# Altium PCB BP.PcbDoc
Units mm, origin at the board's own origin, x right, y up, seen from the top; angles counter-clockwise.
Board outline 87 x 100 mm, 2 copper layers (Top Layer, Bottom Layer); 36 components, 120 nets, 137 pads, 0 vias.
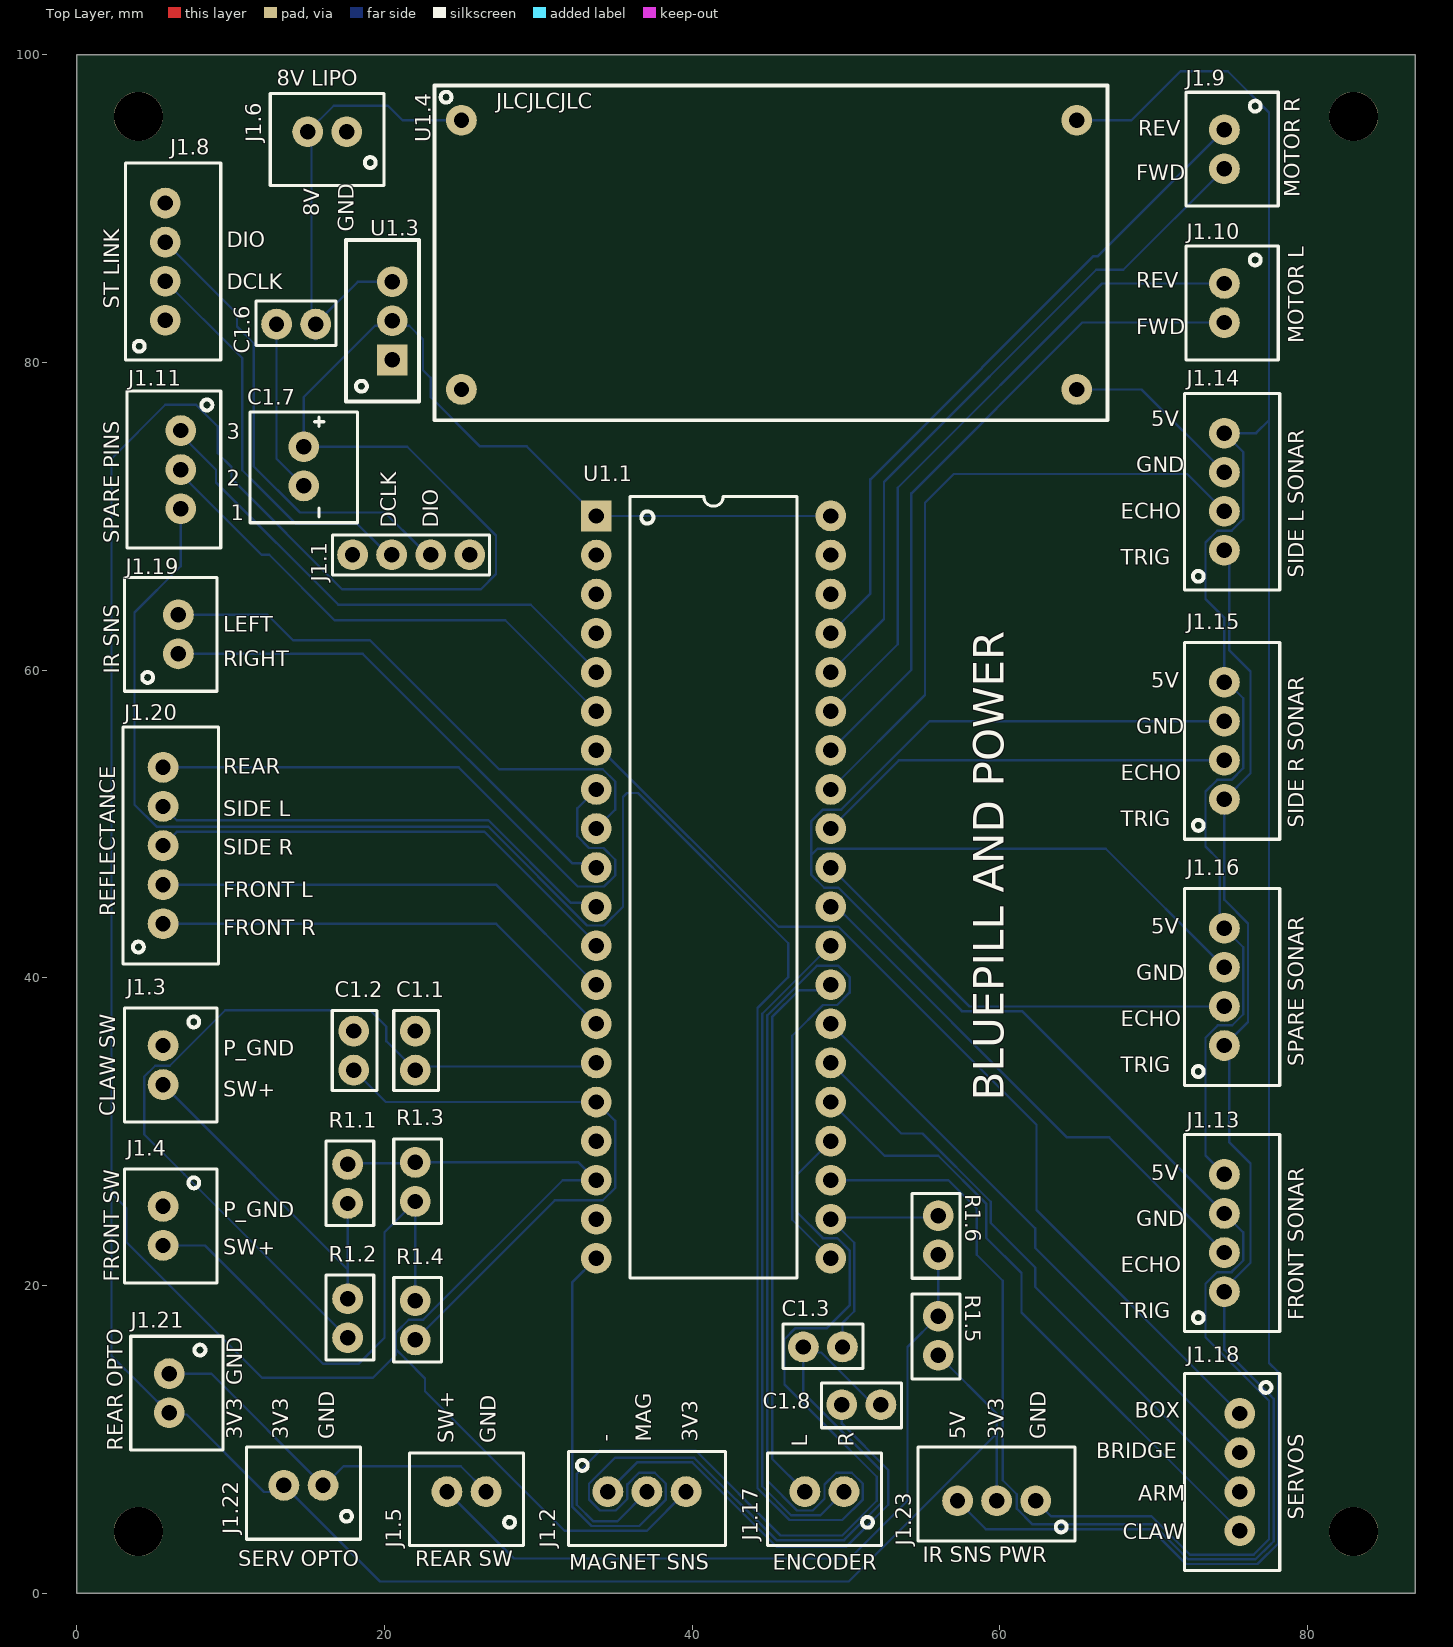
[diagram p0: Top Layer view]
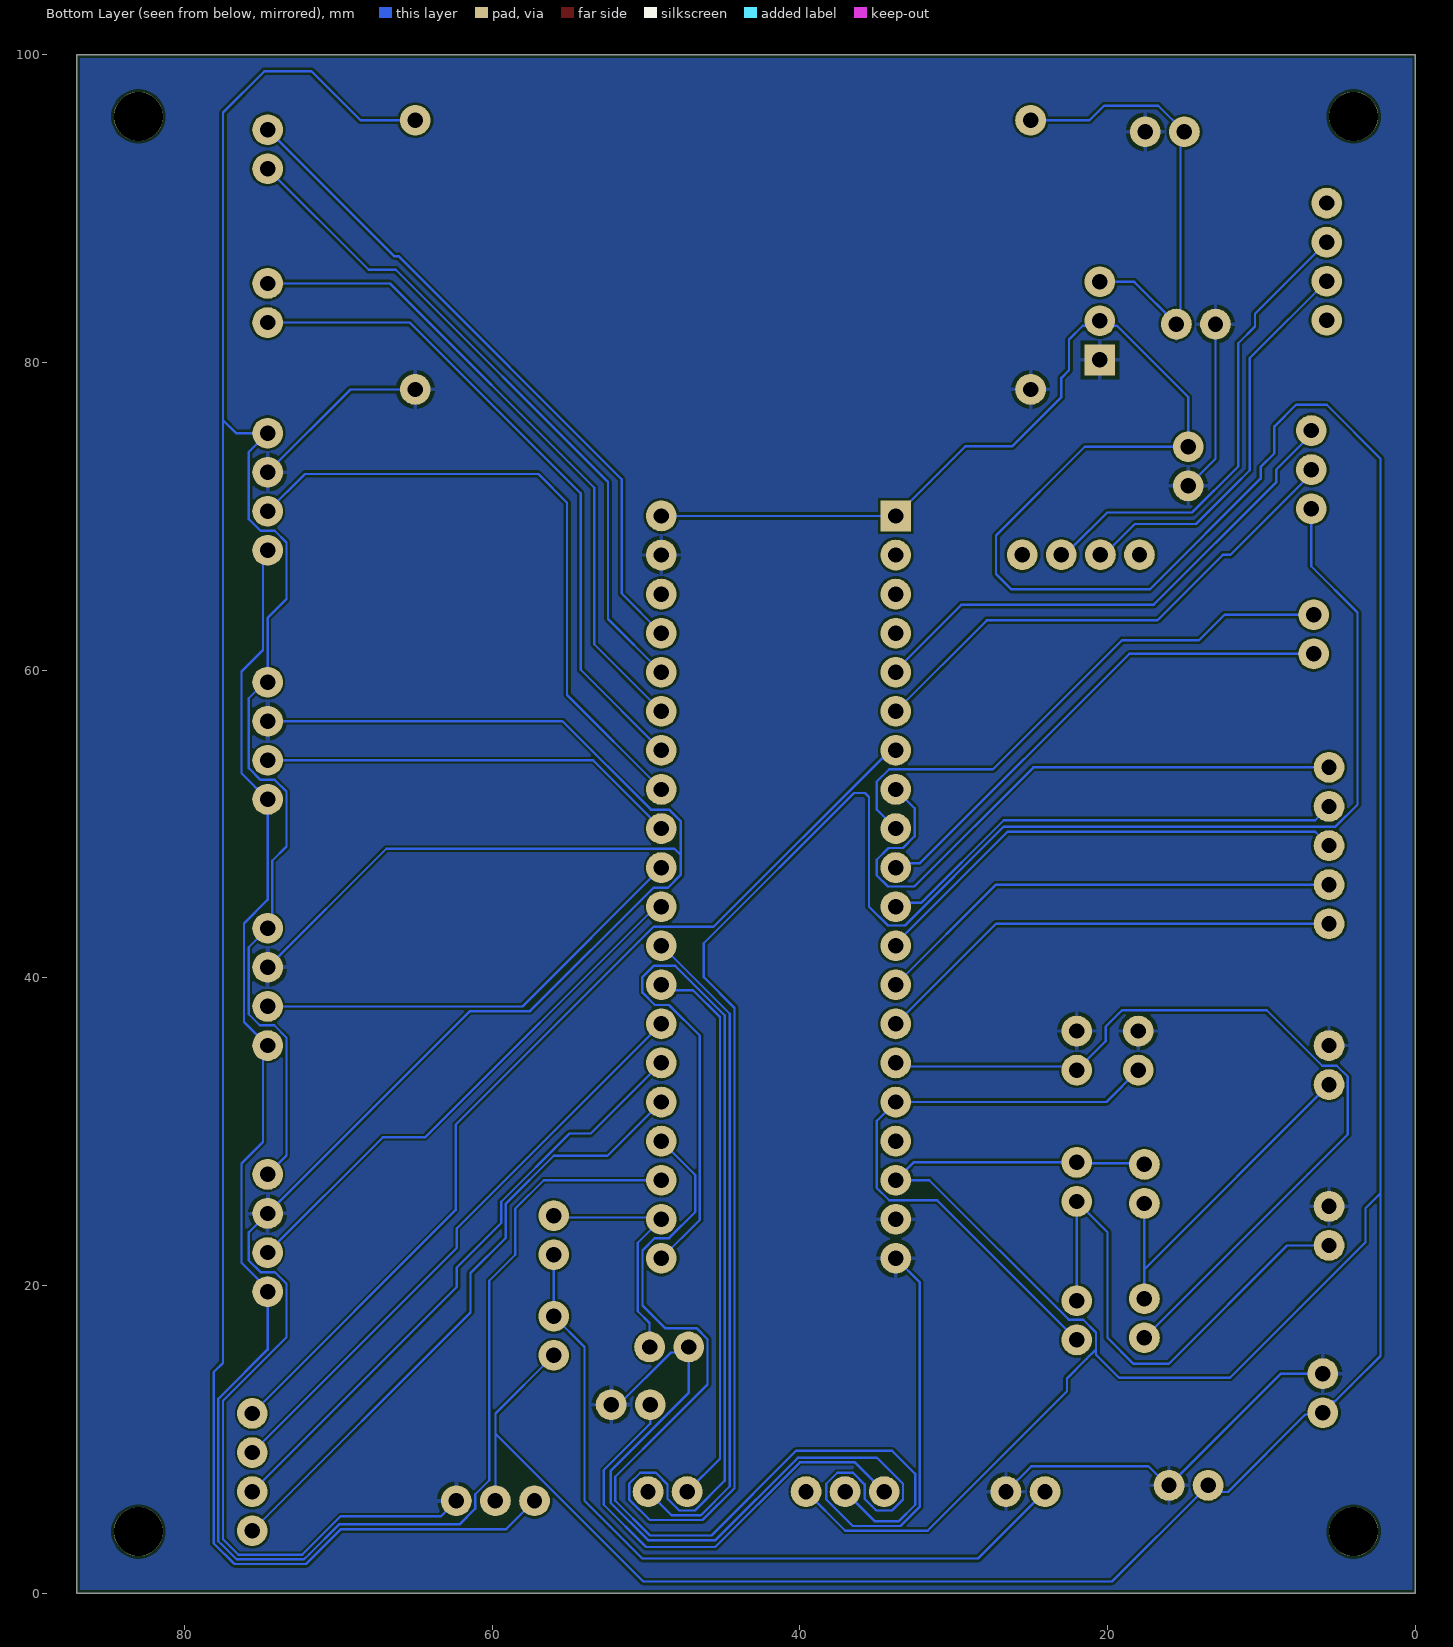
[diagram p1: Bottom Layer view, seen from below]

## Layer stack, top to bottom
Top Solder: solder mask 0.0102, Solder Resist, Dk 3.5
Top Layer: signal copper 0.0356
Dielectric 1: dielectric 0.32, FR-4, Dk 4.8
Bottom Layer: signal copper 0.0356
Bottom Solder: solder mask 0.0102, Solder Resist, Dk 3.5

## Board outline
0,0 0,100 87,100 87,0

## Design rules (kind name [scope] priority, off if disabled: settings)
BoardOutlineClearance [All] p1: gap=0.2 ignorepadtopadclearanceinfootprint=FALSE
Clearance [All] p1: gap=0.152 ignorepadtopadclearanceinfootprint=FALSE
HoleSize [All] p1: absolutevalues=TRUE maxlimit=100 minlimit=0.4 maxpercent=80.000 minpercent=20.000
PolygonConnect [All] p1: connectstyle=Relief reliefconductorwidth=0.254 reliefentries=4 polygonreliefangle="90 Angle" airgapwidth=0.254
RoutingVias [All] p1: holewidth=0.4 width=0.8 viastyle="Through Hole" minholewidth=0.4 minwidth=0.6 maxholewidth=100 maxwidth=100
SilkToSilkClearance [All] p1: silktosilkclearance=0
SilkToSolderMaskClearance [IsPad] p1: minsilkscreentomaskgap=0 clearancetoexposedcopper=TRUE
SolderMaskExpansion [All] p1: expansion=0.102 istentingtop=FALSE
Width [All] p1: maxlimit=100 minlimit=0.152 preferedwidth=0.152
27 further rules are at their usual default settings.

## Components (designator, comment, footprint, x,y, rotation, side; value= is the part's Value field where it differs from the comment)
C1.1 "100n" "Non Polarized Cap" 22,35.27 r270 top
C1.2 "100n" "Non Polarized Cap" 18,35.27 r270 top
C1.3 "100n" "Non Polarized Cap" 48.5,16 r0 top
C1.6 "470n" "Non Polarized Cap" 14.25,82.5 r0 top
C1.7 "10u" "Polarized Cap" 14.75,73.25 r270 top
C1.8 "10n" "Non Polarized Cap" 51,12.25 r180 top
J1.1 "Debug" "Four Pads" 21.73,67.5 r180 top
J1.2 "Magnet Sensor" "3pos JST" 37.06,6.6 r0 top
J1.3 "Claw Microswitch" "2pos JST" 5.6,34.33 r270 top
J1.4 "Front Microswitch" "2pos JST" 5.6,23.87 r270 top
J1.5 "Rear Microswitch" "2pos JST" 25.33,6.6 r180 top
J1.6 "8V Lipo" "2pos JST" 16.27,95 r180 top
J1.8 "SWD BP" "4Pos JST" 5.75,86.56 r90 top
J1.9 "Right Motor BP" "2pos JST" 74.6,93.87 r270 top
J1.10 "Right Motor BP" "2pos JST" 74.6,83.87 r270 top
J1.11 "Spare and Encoder Left" "3pos JST" 6.75,73.04 r270 top
J1.13 "Sonar Front Middle" "4Pos JST" 74.6,23.41 r90 top
J1.14 "Sonar Side Left" "4Pos JST" 74.6,71.6 r90 top
J1.15 "Sonar Side Right" "4Pos JST" 74.6,55.41 r90 top
J1.16 "Sonar Spare" "4Pos JST" 74.6,39.41 r90 top
J1.17 "Encoder Right" "2pos JST" 48.6,6.6 r180 top
J1.18 "Servos" "4Pos JST" 75.6,7.87 r270 top
J1.19 "IR Sensors" "2pos JST" 6.6,62.33 r90 top
J1.20 "Reflectance Sensors" "5POS JST" 5.6,48.6 r90 top
J1.21 "Rear Motor Optocoupler Pwr" "2pos JST" 6,13 r270 top
J1.22 "Servo Optocoupler Pwr" "2pos JST" 14.73,7 r180 top
J1.23 "IR Sensor Power" "3pos JST" 59.79,6 r180 top
R1.1 "10k" Res_Generic 17.6,26.6 r90 top
R1.2 "1k" Res_Generic 17.6,17.87 r90 top
R1.3 "10k" Res_Generic 22,26.73 r90 top
R1.4 "1k" Res_Generic 22,17.73 r90 top
R1.5 "10k" Res_Generic 56,16.73 r270 top
R1.6 "1k" Res_Generic 56,23.27 r270 top
U1.1 "Bluepill" DIP40 41.386,45.896 r0 top
U1.3 "3.3V" TO220 20.5,82.71 r90 top
U1.4 "5V SWITCHER" "ADJ Switcher" 45,87 r0 top

## Footprints (in the part's own frame and the unit in brackets; to place one, negate y for a bottom-side part, rotate by r counter-clockwise, add the part's x,y. Pads: shape width x height; smd on the part's side, far side on the other; paste and mask are expansions set on the pad)
"2pos JST" [mm]
  round 2 hole 1: 1(-1.27,0) 2(1.27,0)
  silkscreen extent -3.7,-2.5 3.7,3.5, body extent -3.7,-2.4 3.7,3.35, height 7.01
"3pos JST" [mm]
  round 2 hole 1: 1(-2.54,0) 2(0,0) 3(2.54,0)
  silkscreen extent -5.1,-3.5 5.1,2.6, body extent -4.95,-3.35 4.95,2.4, height 7
"4Pos JST" [mm]
  round 2 hole 1: 1(-3.81,0) 2(-1.27,0) 3(1.27,0) 4(3.81,0)
  silkscreen extent -6.4,-3.6 6.4,2.6, body extent -6.2,-3.38 6.2,2.37, height 7.01
"5POS JST" [mm]
  round 2 hole 1: 1(-5.08,0) 2(-2.54,0) 3(0,0) 4(2.54,0) 5(5.08,0)
  silkscreen extent -7.7,-3.6 7.7,2.6, body extent -7.45,-3.4 7.45,2.35, height 7
"ADJ Switcher" [mm]
  round 2 hole 1: 1(-20,8.75) 2(-20,-8.75) 3(20,-8.75) 4(20,8.75)
  silkscreen extent -21.75,-10.75 22,11, body extent -21.5,-10.5 21.7,10.75, height 13.36
DIP40 [mm]
  rect 2x2 hole 1: 1(-7.62,24.13)
  round 2 hole 1: 2(-7.62,21.59) 3(-7.62,19.05) 4(-7.62,16.51) 5(-7.62,13.97) 6(-7.62,11.43) 7(-7.62,8.89) 8(-7.62,6.35) 9(-7.62,3.81) 10(-7.62,1.27) 11(-7.62,-1.27) 12(-7.62,-3.81) 13(-7.62,-6.35) 14(-7.62,-8.89) 15(-7.62,-11.43) 16(-7.62,-13.97) 17(-7.62,-16.51) 18(-7.62,-19.05) 19(-7.62,-21.59) 20(-7.62,-24.13) 21(7.62,-24.13) 22(7.62,-21.59) 23(7.62,-19.05) 24(7.62,-16.51) 25(7.62,-13.97) 26(7.62,-11.43) 27(7.62,-8.89) 28(7.62,-6.35) 29(7.62,-3.81) 30(7.62,-1.27) 31(7.62,1.27) 32(7.62,3.81) 33(7.62,6.35) 34(7.62,8.89) 35(7.62,11.43) 36(7.62,13.97) 37(7.62,16.51) 38(7.62,19.05) 39(7.62,21.59) 40(7.62,24.13)
  silkscreen extent -5.42,-25.4 5.42,25.4, body extent -8.7,-25.67 8.8,25.63, height 4.71
"Four Pads" [mm]
  round 2 hole 1: 1(-3.81,0) 2(-1.27,0) 3(1.27,0) 4(3.81,0)
  silkscreen extent -5.1,-1.3 5.1,1.3
"Non Polarized Cap" [mm] "Cap Generic THT"
  round 2 hole 1: 1(-1.27,0) 2(1.27,0)
  silkscreen extent -2.6,-1.4 2.6,1.5, body extent -2,-1.2 2,1.3, height 6
"Polarized Cap" [mm]
  round 2 hole 1: 1(-1.27,0) 2(1.27,0)
  silkscreen extent -3.53,-3.5 3.66,3.5, body extent -3.25,-3.22 3.25,3.28, height 11.37
Res_Generic [mm] "Cap Generic THT Footprint"
  round 2 hole 1: 1(-1.27,0) 2(1.27,0)
  silkscreen extent -2.71,-1.7 2.8,1.4, body extent -1.47,-1.3 2.4,1, height 8.18
TO220 [mm]
  rect 2x2 hole 1: 1(-2.54,0)
  round 2 hole 1: 2(0,0) 3(2.54,0)
  silkscreen extent -5.25,-1.75 5.25,3, body extent -5.08,-1.66 5.08,2.91, height 19.6

## Part data
C1.1 C1.2 C1.3 C1.6 C1.8: library part Cap_Generic
C1.7: library part "Polarized Cap"
J1.1: library part "BP SWD Conn"
J1.2 J1.11 J1.23: library part "3pos Conn", "3pos Conn"
J1.3 J1.4 J1.5 J1.6 J1.9 J1.10 J1.17 J1.19 J1.21 J1.22: library part "2pos Conn", "2pos Conn JST"
J1.8 J1.13 J1.14 J1.15 J1.16 J1.18: library part "4pos Conn", "4pos Conn"
J1.20: library part "5pos Conn", "5pos Conn JST"
R1.1 R1.2 R1.3 R1.4 R1.5 R1.6: library part Res_Generic
U1.1: "STM32F103C8T6"
U1.3: library part "MC33269 3.3V Reg", "MC33269 IC REG LINEAR 3.3V 800MA TO220-3", Supplier Part Number 1=595-UA78M33CKCS, Supplier 1=Mouser
U1.4: library part LM2596S, "Adjutable Switcher 3.5A Max"

## Free pads (board coordinates)
  round 3.2 hole 3.2: ""(4,4) ""(4,96) ""(83,4) ""(83,96)

## Nets (pads, with @x,y where several pads share a name; then routed paths per layer and width w, separated by ;. In a path a pad name is that pad's centre, name@x,y a point inside that pad or via, vN(x,y) a via of type N, cw(c..) or ccw(c..) an arc to the next point about the centre after c; other vN are vias at no path point)
2.5V_GND: 
3.3V_P: C1.7.1 J1.2.3 J1.21.2 J1.22.2 J1.23.2 R1.1.2 R1.3.2 R1.5.2 U1.1.1 U1.1.18 U1.1.40 U1.3.2 | length 320
  Bottom Layer w0.152: J1.21.2 6.119,11.611 7.139,11.611 12.172,6.578 12.538,6.578 12.607,6.646 13.814,6.646 19.71,0.75 50.181,0.75 59.79,10.359 ; J1.21.2@6,12.48 5.191,12.48 4.162,13.509 2.25,15.42 2.25,26 ; R1.1.2 17.665,27.935 21.935,27.935 R1.3.2 32.613,28 U1.1.18 31.584,26.846 22.509,17.771 21.574,17.771 20.75,16.948 20.75,15.839 ; J1.2.3 37.055,4.055 31.695,4.055 22.633,13.117 22.633,13.957 21.358,15.231 20.75,15.839 ; U1.1.40 U1.1.1 29.244,74.548 26.202,74.548 23,77.75 23,79 22.5,79.5 22.5,81.5 21.611,82.389 20.821,82.389 U1.3.2 20.179,82.389 19.389,82.389 14.75,77.75 C1.7.1 21.48,74.52 27.25,68.75 27.25,66.25 26.25,65.25 17.25,65.25 10.048,72.452 10.048,73.202 9.153,74.097 9.153,75.847 7.75,77.25 5.75,77.25 2.25,73.75 2.25,26 ; R1.5.2 59.79,11.67 59.79,10.359 ; J1.23.2 59.79,9.46 59.79,10.359 ; 2.25,26 3.227,25.023 3.227,22.806 12.033,14 19.25,14 20.75,15.5 20.75,15.839
5V_ARM: 
5V_P: J1.13.4 J1.14.4 J1.15.4 J1.16.4 J1.23.3 U1.4.4 | length 190.6
  Bottom Layer w0.152: J1.23.3 59.088,4.162 69.833,4.162 72.105,1.89 76.753,1.89 78.11,3.247 78.11,14.353 77.5,14.962 77.5,76.25 ; U1.4.4 68.563,95.75 71.75,98.937 74.813,98.937 77.5,96.25 77.5,76.25 ; J1.13.4 73.371,28.449 73.371,36.109 74.174,36.911 75.109,36.911 75.829,37.631 75.829,41.991 J1.16.4 74.295,43.525 74.295,47.605 73.371,48.529 73.371,52.109 74.132,52.87 75.068,52.87 75.829,53.631 75.829,58.171 74.78,59.22 J1.15.4 74.6,63.395 73.371,64.624 73.371,68.299 74.133,69.06 75.068,69.06 75.829,69.821 75.829,74.181 J1.14.4 76.66,75.41 77.5,76.25
5V_SERVO: 
8V: C1.6.2 J1.6.2 U1.3.3 U1.4.1 | length 30.9
  Bottom Layer w0.152: 15.52,81.5 15.25,81.77 15.25,83.77 15.25,94.75 J1.6.2 16.699,96.699 20.225,96.699 21.173,95.75 U1.4.1 ; C1.6.2 18.27,85.25 U1.3.3
15V: 
ARM_SERV_BP_OUT: J1.18.3 U1.1.26 | length 39.7
  Bottom Layer w0.152: U1.1.26 53.589,29.884 54.977,29.884 59.414,25.447 59.414,24.059 62.303,21.17 62.303,19.897 J1.18.3
ARM_SERV_PWM: 
BOX_SERV_BP_OUT: J1.18.1 U1.1.7 | length 62.9
  Bottom Layer w0.152: U1.1.7 34.145,54.786 45.616,43.315 49.515,43.315 62.381,30.449 62.381,24.899 J1.18.1
BOX_SERV_PWM: 
BRIDGE_SERV_BP_OUT: J1.18.2 U1.1.27 | length 38.9
  Bottom Layer w0.152: U1.1.27 62.303,23.71 62.303,22.437 J1.18.2
BRIDGE_SERV_PWM: 
CLAW_SERV_BP_OUT: J1.18.4 U1.1.25 | length 40.9
  Bottom Layer w0.152: U1.1.25 52.503,28.43 56.001,28.43 59.109,25.321 59.109,23.106 61.414,20.801 61.414,18.246 J1.18.4
CLAW_SERV_PWM: 
DCLK: J1.1.3 J1.8.2 | length 25.4
  Bottom Layer w0.152: J1.8.2 10.586,80.454 10.75,80.29 10.75,73 11.75,72 14.25,69.5 18.23,69.5 J1.1.3@19.73,68
DIO: J1.1.2 J1.8.3 | length 29.9
  Bottom Layer w0.152: J1.8.3 10.412,83.168 10.412,82.338 11.5,81.25 11.5,80 11.5,73.25 14.5,70.25 20.02,70.25 J1.1.2@22.27,68
ECHO_F_M: J1.13.2 U1.1.30 | length 34.9
  Bottom Layer w0.152: U1.1.30 49.374,44.626 64.371,29.629 67.111,29.629 J1.13.2
ECHO_S_L: J1.14.2 U1.1.33 | length 42.4
  Bottom Layer w0.152: U1.1.33 49.006,52.256 55.139,58.389 55.139,70.889 57,72.75 72.18,72.75 J1.14.2
ECHO_S_R: J1.15.2 U1.1.32 | length 27.4
  Bottom Layer w0.152: U1.1.32 53.44,54.14 J1.15.2
ECHO_SPARE: J1.16.2 U1.1.31 | length 29.3
  Bottom Layer w0.152: U1.1.31 58.033,38.14 J1.16.2
ENCODER_L_I: J1.11.1 U1.1.5 | length 34.2
  Bottom Layer w0.152: J1.11.1 6.75,75.319 9.04,73.029 9.04,72.21 17,64.25 29.5,64.25 33.766,59.984 U1.1.5
ENCODER_L_Q: J1.11.2 U1.1.6 | length 33.7
  Bottom Layer w0.152: J1.11.2 6.75,72.75 12,67.5 12.5,67.5 16.75,63.25 27.843,63.25 U1.1.6
ENCODER_R_I: J1.17.1 U1.1.29 | length 43.7
  Bottom Layer w0.152: U1.1.29 48.975,42.086 44.555,37.666 44.555,6.945 46.445,5.055 48.325,5.055 J1.17.1
ENCODER_R_Q: J1.17.2 U1.1.28 | length 36.4
  Bottom Layer w0.152: J1.17.2 45.195,8.735 45.195,37.445 46.948,39.198 48.658,39.198 U1.1.28
IR_LEFT_TRANS: 
IR_RIGHT_TRANS: 
IR_SNS_LEFT: J1.19.2 U1.1.9 | length 36.4
  Bottom Layer w0.152: J1.19.2 12.393,63.6 14.047,61.945 19.055,61.945 27.442,53.558 34.192,53.558 34.995,52.755 34.995,50.935 U1.1.9
IR_SNS_RIGHT: J1.19.1 U1.1.10 | length 32.9
  Bottom Layer w0.152: J1.19.1 18.59,61.06 32.195,47.455 33.478,47.455 U1.1.10
LEFT+: 
LEFT-: 
LEFT_FWD: 
LEFT_FWD_BP_OUT: J1.10.2 U1.1.34 | length 43.8
  Bottom Layer w0.152: U1.1.34 54.25,60.03 54.25,71.493 65.357,82.6 J1.10.2
LEFT_REV: 
LEFT_REV_BP_OUT: J1.10.1 U1.1.35 | length 43.1
  Bottom Layer w0.152: U1.1.35 53.361,61.681 53.361,71.861 66.64,85.14 J1.10.1
M_GND: 
MAGNET_SNS: J1.2.2 U1.1.24 | length 62.8
  Bottom Layer w0.152: J1.2.2 35.124,4.664 33.586,4.664 32.5,5.75 32.5,7.75 34,9.25 40.25,9.25 45.75,3.75 49.75,3.75 52,6 52,7.569 48.502,11.068 46.001,13.568 46.001,16.509 46.721,17.229 48.758,17.229 50.235,18.705 50.235,22.275 49.432,23.078 48.498,23.078 46.805,24.771 46.805,27.185 U1.1.24
NetC1.8_2: C1.8.2 J1.2.1 | length 30.2
  Bottom Layer w0.152: J1.2.1 36.42,8.5 40,8.5 45.5,3 50,3 52.75,5.75 52.75,8 49.73,11.02 C1.8.2
NetC5.1_1: 
NetC5.1_2: 
NetC5.2_1: 
NetC5.2_2: 
NetC5.3_1: 
NetC5.4_1: 
NetQ2.1_2: 
NetQ2.1_3: 
NetQ2.2_2: 
NetQ2.2_3: 
NetQ2.3_2: 
NetQ2.3_3: 
NetQ2.4_2: 
NetQ2.4_3: 
NetQ3.1_2: 
NetQ3.1_3: 
NetQ3.2_2: 
NetQ3.2_3: 
NetQ3.3_2: 
NetQ3.3_3: 
NetQ3.4_2: 
NetQ3.4_3: 
NetQ3.5_1: 
NetQ3.6_1: 
NetQ3.7_1: 
NetQ3.8_1: 
NetR2.3_2: 
NetR2.6_2: 
NetR2.7_1: 
NetR2.8_1: 
NetR2.13_2: 
NetR2.14_2: 
NetR2.15_2: 
NetR2.16_2: 
NetR3.3_2: 
NetR3.4_1: 
NetR3.5_1: 
NetR3.6_2: 
NetR3.11_2: 
NetR3.12_2: 
NetR3.13_1: 
NetR3.14_2: 
NetR4.11_2: 
NetR4.13_2: 
NetR4.15_2: 
NetR4.17_2: 
NetR4.19_2: 
NetR5.2_1: 
NetR5.4_2: 
NetR5.7_1: 
NetR5.9_2: 
NetR5.15_1: 
P_GND: C1.1.1 C1.2.1 C1.3.1 C1.6.1 C1.7.2 C1.8.1 J1.3.1 J1.4.1 J1.5.1 J1.6.1 J1.13.3 J1.14.3 J1.15.3 J1.16.3 J1.21.1 J1.22.1 J1.23.1 U1.1.19 U1.1.20 U1.1.39 U1.3.1 U1.4.2 U1.4.3 | length 263.6
  Bottom Layer w0.152: J1.4.1@5.295,25.14 J1.4.1 J1.4.1@5.6,25.1 ; J1.21.1 8.73,14.27 J1.22.1 16.08,7 17.33,8.25 24.95,8.25 J1.5.1 ; 12.98,81.5 12.98,73.75 C1.7.2 ; U1.1.20 32.195,20.195 32.195,5.624 33.46,4.36 36.557,4.36 38.289,6.091 38.289,7.109 37.569,7.829 36.551,7.829 35.79,7.068 35.79,6.132 35.029,5.371 34.011,5.371 33.291,6.091 33.291,7.109 34.987,8.805 40.126,8.805 45.486,3.445 49.876,3.445 52.305,5.874 52.305,7.938 47.23,13.012 C1.3.1 47.584,15.646 48.386,15.646 51.782,12.25 C1.8.1 C1.8.1@52.26,12.26 ; J1.23.1 63.33,5 69.857,5 72.357,2.5 76.5,2.5 77.5,3.5 77.5,12.5 73.371,16.629 73.371,20.109 74.132,20.87 75.068,20.87 75.829,21.631 75.829,23.451 J1.13.3 61.445,37.835 57.535,37.835 49.515,45.855 48.58,45.855 47.75,46.685 47.75,48 ; U1.4.3 69.22,78.25 J1.14.3 ; J1.16.3 66.885,48.395 48.145,48.395 47.75,48 ; J1.15.3 55.43,56.68 49.685,50.935 48.497,50.935 47.75,50.188 47.75,48
REF_F_L_COL: 
REF_F_L_LED: 
REF_F_L_SNS: J1.20.2 U1.1.13 | length 30.9
  Bottom Layer w0.152: J1.20.2 27.253,46.06 U1.1.13
REF_F_R_COL: 
REF_F_R_LED: 
REF_F_R_SNS: J1.20.1 U1.1.14 | length 30.9
  Bottom Layer w0.152: J1.20.1 27.253,43.52 U1.1.14
REF_R_COL: 
REF_R_LED: 
REF_R_SNS: J1.20.5 U1.1.8 | length 40.6
  Bottom Layer w0.152: J1.20.5 24.82,53.68 32.562,45.938 34.275,45.938 34.995,46.658 34.995,47.675 34.234,48.436 33.299,48.436 32.538,49.198 32.538,51.018 U1.1.8
REF_S_L_COL: 
REF_S_L_LED: 
REF_S_L_SNS: J1.20.4 U1.1.11 | length 30.9
  Bottom Layer w0.152: J1.20.4 6.49,50.25 26.75,50.25 32.127,44.873 33.52,44.873 U1.1.11
REF_S_R_COL: 
REF_S_R_LED: 
REF_S_R_SNS: J1.20.3 U1.1.12 | length 31.7
  Bottom Layer w0.152: J1.20.3 6.5,49.5 26.5,49.5 33.766,42.234 U1.1.12
RIGHT+: 
RIGHT-: 
RIGHT_FWD: 
RIGHT_FWD_BP_OUT: J1.9.2 U1.1.36 | length 44.4
  Bottom Layer w0.152: U1.1.36 52.472,63.332 52.472,72.229 66.272,86.029 68.029,86.029 J1.9.2
RIGHT_REV: 
RIGHT_REV_BP_OUT: J1.9.1 U1.1.37 | length 43.5
  Bottom Layer w0.152: U1.1.37 51.583,64.983 51.583,72.402 66.099,86.918 66.378,86.918 J1.9.1
SPARE_1: J1.11.3 U1.1.21 | length 191.1
  Bottom Layer w0.152: J1.11.3 6.75,66.75 3.75,63.75 3.75,51.252 5.174,49.829 26.741,49.829 33.171,43.398 34.275,43.398 35.5,44.623 35.5,51.75 35.767,52.017 36.483,52.017 46.25,42.25 46.25,40.045 44.25,38.045 44.25,6.819 46.319,4.75 49.758,4.75 51.099,6.091 51.099,7.109 50.379,7.829 49.361,7.829 48.6,7.067 48.6,6.132 47.839,5.371 46.821,5.371 44.891,7.302 44.891,37.572 48.094,40.775 49.515,40.775 50.235,40.055 50.235,39.038 49.433,38.235 48.497,38.235 46.5,36.238 46.5,24.273 U1.1.21
SW_CLAW+: J1.3.2 R1.1.1 R1.2.2 | length 23.2
  Bottom Layer w0.152: J1.3.2 17.6,21.06 ; R1.2.2 17.6,21.06 ; R1.1.1 17.6,21.06
SW_CLAW_SNS: C1.1.2 R1.2.1 U1.1.15 | length 56
  Bottom Layer w0.152: R1.2.1 6.975,27.225 4.371,29.829 4.371,33.569 5.091,34.289 6.039,34.289 9.642,37.892 19.05,37.892 20.122,36.82 20.122,35.878 C1.1.2 22.233,34.233 33.533,34.233 U1.1.15
SW_FRONT+: J1.4.2 R1.3.1 R1.4.2 | length 34.4
  Bottom Layer w0.152: J1.4.2 8.322,22.6 16.02,14.902 18.304,14.902 20,16.598 20,23.46 R1.3.1 R1.4.2
SW_FRONT_SNS: C1.2.2 R1.4.1 U1.1.16 | length 39.8
  Bottom Layer w0.152: C1.2.2 20.074,31.926 U1.1.16 34.995,30.698 34.995,26.338 34.193,25.535 31.075,25.535 R1.4.1
SW_REAR+: J1.5.2 R1.5.1 R1.6.2 | length 50.1
  Bottom Layer w0.152: J1.5.2 28.41,2.25 50.25,2.25 54,6 54,9.25 54,16 R1.5.1 R1.6.2
SW_REAR_SNS: C1.3.2 R1.6.1 U1.1.22 | length 17.1
  Bottom Layer w0.152: C1.3.2@49.79,15.25 49.79,16 C1.3.2 49.77,17.56 50.539,18.329 50.539,22.773 U1.1.22 49.123,24.423 55.883,24.423 R1.6.1
TRIG_COM: J1.13.1 J1.14.1 J1.15.1 J1.16.1 U1.1.23 | length 119.2
  Bottom Layer w0.152: U1.1.23 56.654,26.846 58.5,25 58.5,22 60.195,20.305 60.195,7.332 61.101,6.426 61.101,5.491 62.126,4.467 69.959,4.467 71.899,2.527 72.231,2.195 75.904,2.195 76.626,2.195 77.555,3.124 77.805,3.374 77.805,12.626 77.555,12.876 74.6,15.831 J1.13.1 74.6,19.781 76.298,21.479 76.298,27.924 74.905,29.317 74.905,35.295 J1.16.1 76.133,37.133 76.133,43.536 74.6,45.069 J1.15.1 76.298,53.299 76.298,59.924 74.905,61.317 74.905,67.485 J1.14.1
pads on no net: J1.1.1 J1.1.4 J1.8.1 J1.8.4 U1.1.2 U1.1.3 U1.1.4 U1.1.17 U1.1.38

## Polygon pours and split planes (outlines as drawn)
P_GND on Bottom Layer "GND " (solid, remove dead copper, pour order 0): 87,0 87,100 0,100 0,0

## Silkscreen, mask and mechanical layers (free items; w line width, h text height)
Top Overlay:
  text "8V LIPO" at 13.004,98.004 h1
  text "JLCJLCJLC" at 27.254,96.504 h1
  text "REV" at 69.004,94.754 h1
  text "FWD" at 68.854,91.854 h1
  text "MOTOR R" at 79.496,90.754 h1 r90
  text "8V" at 15.746,89.504 h1 r90
  text "GND" at 17.996,88.504 h1 r90
  text "DIO" at 9.754,87.504 h1
  text "REV" at 68.854,84.854 h1
  text "DCLK" at 9.754,84.754 h1
  text "ST LINK" at 2.746,83.504 h1 r90
  text "FWD" at 68.854,81.854 h1
  text "MOTOR L" at 79.746,81.254 h1 r90
  text "5V" at 69.854,75.854 h1
  text "3" at 9.754,75.004 h1
  text "GND" at 68.854,72.854 h1
  text "2" at 9.754,72.004 h1
  text "ECHO" at 67.854,69.854 h1
  text "1" at 10.004,69.754 h1
  text "DCLK" at 20.746,69.254 h1 r90
  text "DIO" at 23.496,69.254 h1 r90
  text "SPARE PINS" at 2.746,68.254 h1 r90
  text "TRIG" at 67.854,66.854 h1
  text "SIDE L SONAR" at 79.746,66.004 h1 r90
  text "LEFT" at 9.504,62.504 h1
  text "RIGHT" at 9.504,60.254 h1
  text "IR SNS" at 2.746,59.754 h1 r90
  text "5V" at 69.854,58.854 h1
  text "GND" at 68.854,55.854 h1
  text "REAR" at 9.504,53.254 h1
  text "ECHO" at 67.854,52.854 h1
  text "SIDE L" at 9.504,50.504 h1
  text "TRIG" at 67.854,49.854 h1
  text "SIDE R SONAR" at 79.746,49.754 h1 r90
  text "SIDE R" at 9.504,48.004 h1
  text "FRONT L" at 9.504,45.254 h1
  text "REFLECTANCE" at 2.496,44.004 h1 r90
  text "5V" at 69.854,42.854 h1
  text "FRONT R" at 9.504,42.754 h1
  text "GND" at 68.854,39.854 h1
  text "ECHO" at 67.854,36.854 h1
  text "P_GND" at 9.504,34.921 h1
  text "SPARE SONAR" at 79.746,34.254 h1 r90
  text "TRIG" at 67.854,33.854 h1
  text "SW+" at 9.504,32.254 h1
  text "BLUEPILL AND POWER" at 60.25,32 h2 r90
  text "CLAW SW" at 2.496,31.004 h1 r90
  text "5V" at 69.854,26.854 h1
  text "P_GND" at 9.504,24.421 h1
  text "GND" at 68.854,23.854 h1
  text "SW+" at 9.504,22.004 h1
  text "ECHO" at 67.854,20.854 h1
  text "FRONT SW" at 2.746,20.254 h1 r90
  text "TRIG" at 67.854,17.854 h1
  text "FRONT SONAR" at 79.746,17.754 h1 r90
  text "GND" at 10.746,13.504 h1 r90
  text "BOX" at 68.761,11.407 h1
  text "3V3" at 10.746,10.004 h1 r90
  text "3V3" at 13.746,10.004 h1 r90
  text "GND" at 16.746,10.004 h1 r90
  text "5V" at 57.746,10.004 h1 r90
  text "3V3" at 60.246,10.004 h1 r90
  text "GND" at 62.996,10.004 h1 r90
  text "-" at 34.846,9.854 h1 r90
  text "MAG" at 37.346,9.854 h1 r90
  text "3V3" at 40.346,9.854 h1 r90
  text "SW+" at 24.496,9.754 h1 r90
  text "GND" at 27.246,9.754 h1 r90
  text "L" at 47.496,9.504 h1 r90
  text "R" at 50.496,9.504 h1 r90
  text "REAR OPTO" at 2.996,9.254 h1 r90
  text "BRIDGE" at 66.254,8.754 h1
  text "ARM" at 69.004,6.004 h1
  text "SERVOS" at 79.746,4.754 h1 r90
  text "CLAW" at 68.004,3.504 h1
  text "IR SNS PWR" at 55.004,2.004 h1
  text "SERV OPTO" at 10.504,1.754 h1
  text "REAR SW" at 22.004,1.754 h1
  text "MAGNET SNS" at 32.004,1.504 h1
  text "ENCODER" at 45.254,1.504 h1
Mechanical 1:
  the board outline again, w0.2